# EAGLE board R2Quad Power Distribution Board (EAGLE 7.3.0)
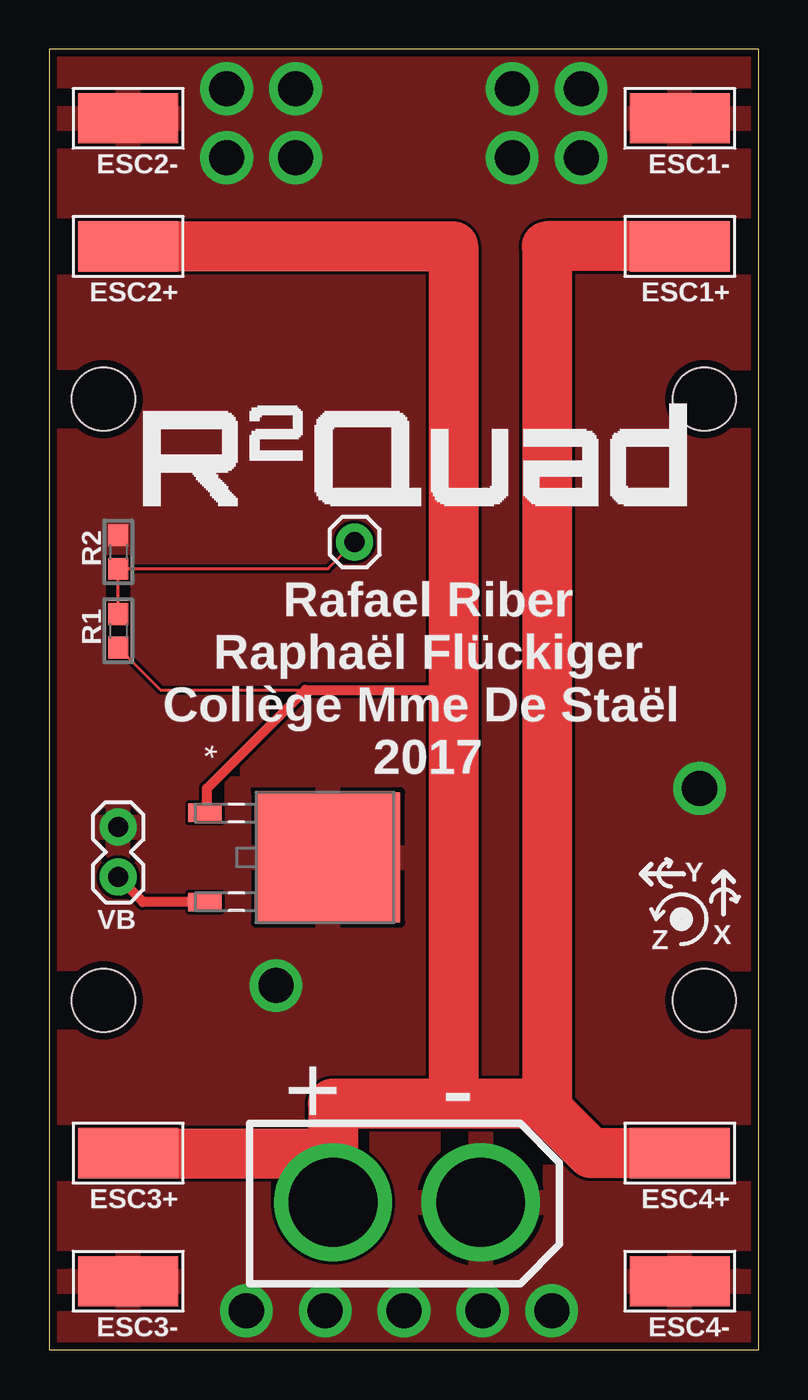
[diagram p0: board, top side]
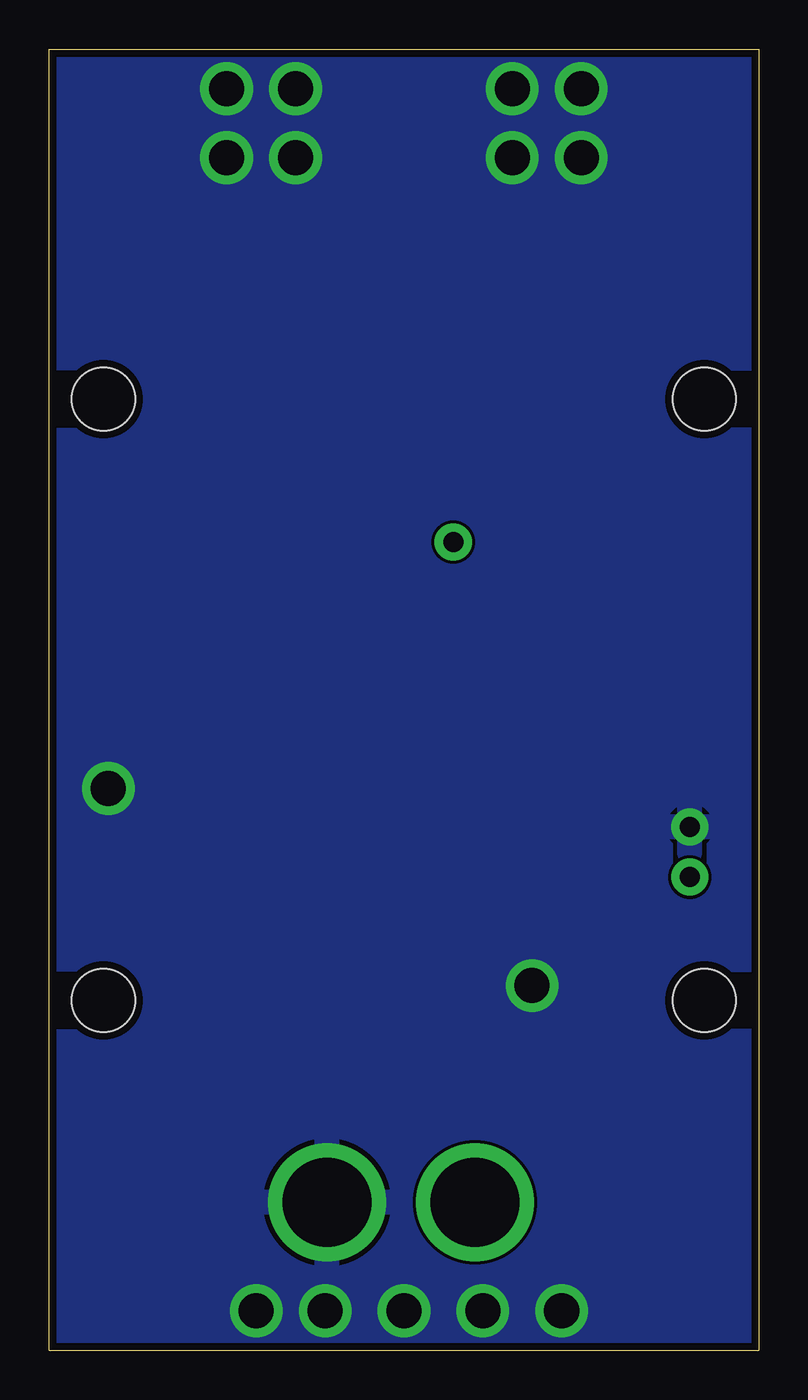
[diagram p1: board, bottom side, seen from below]

Size 36 x 66 mm. Coordinates in mm from the lower left corner, seen from the top.
Outline: 36,0 36,66 0,66 0,0 36,0
Copper layers (1*16): Top 0.0356mm / dielectric 1.5011mm / Bottom 0.0356mm
Design rules "oshpark-2layer-tented *": minimum track width 6mil, minimum drill 13mil, track to track 6mil, track to pad 6mil, pad to pad 6mil, via to via 6mil, smd to smd 6mil, copper to edge 15mil, drill to drill 6mil, minimum pad ring 7mil, minimum via ring 7mil, stop-mask expansion 2.5mil, vias tented up to drill 200mil, thermal gap 10mil
Holes 3.2 mm at 2.75,17.75 33.25,17.75 33.25,48.25 2.75,48.25

## Footprints (pad centres in the part's own frame; a part is rotated, then mirrored left to right if it is on the bottom)
5-2,5 = smd 2.54 x 5.08: 1 0,0
0603 = smd 1.1 x 1: 1 -0.85,0; 2 0.85,0
TO228P972X240-3N = smd 0.94 x 1.702: 1 -2.261,-6.096; 3 2.261,-6.096 | smd 6.604 x 7.315: 2 0,0.152
XT60 = drill 4.5 pad 6: 1 4,4; 2 11.5,4
1X02 = drill 1.016 pad 1.88: 1 0,0; 2 2.54,0
1X01 = drill 1.016 pad 1.88: 1 0,0

## Placement (x,y rotation side)
ESC1+  WIREPADSMD5-2,5  [5-2,5]  32,56 90 top
ESC1-  WIREPADSMD5-2,5  [5-2,5]  32,62.5 90 top
ESC2+  WIREPADSMD5-2,5  [5-2,5]  4,56 90 top
ESC2-  WIREPADSMD5-2,5  [5-2,5]  4,62.5 90 top
ESC3+  WIREPADSMD5-2,5  [5-2,5]  4,10 90 top
ESC3-  WIREPADSMD5-2,5  [5-2,5]  4,3.5 90 top
ESC4+  WIREPADSMD5-2,5  [5-2,5]  32,10 90 top
ESC4-  WIREPADSMD5-2,5  [5-2,5]  32,3.5 90 top
R1  4.12K  [0603]  3.5,36.5 270 top
R2  1K  [0603]  3.5,40.5 270 top
U1  LF33ABDT-TR  [TO228P972X240-3N]  14,25 270 top
U$1  XT60  [XT60]  25.9,11.5 180 top
U$2  [R2QUAD_LOGO]  16,45.5 0 top
U$3  [SENSOR_AXIS]  32.5,22.5 0 top
VB  [1X02]  3.5,24 90 top
VSENSE  [1X01]  15.5,41 0 top

## Library data of the parts
ESC1+ ESC1- ESC2+ ESC2- ESC3+ ESC3- ESC4+ ESC4- = wirepad
R1 R2 = microbuilder
U1 = LF33ABDT-TR; AVAILABILITY: Good; DESCRIPTION: LF33 Series 3.3 V 500 mA Very Low Drop Voltage Regulator with Inhibit - TO-252; MF: STMicroelectronics; MP: LF33ABDT-TR; PACKAGE: None; PRICE: 0.43 USD
U$1-U$3 = Rafael's Library
VB VSENSE = SparkFun-Connectors

## Nets
+3V3: U1.3 VB.1
GND: ESC1-.1 ESC2-.1 ESC3-.1 ESC4-.1 R2.1 U1.2 U$1.1 VB.2
N$1: R1.1 R2.2 VSENSE.1
VCC: ESC1+.1 ESC2+.1 ESC3+.1 ESC4+.1 R1.2 U1.1 U$1.2

## Tracks (layer width: path | path; a pad name or v marks a point on that pad's centre or on a via)
+3V3
  Top 0.508: U1.3 4.76,22.74 VB.1
GND  (via drill 1.78)
  other vias: 14,2 22,2 18,2 10,2 25.5,2 33,28.5 11.5,18.5 27,64 27,60.5 23.5,64 23.5,60.5 12.5,64 12.5,60.5 9,64 9,60.5
  pour Bottom: 0,66 36,66 36,0 0,0
  pour Top: 0,66 36,66 36,0 0,0
N$1
  Top 0.152: R1.1 R2.2 14.15,39.65 VSENSE.1
VCC
  Top 0.152: R1.2 5.65,33.5 13,33.5
  Top 0.508: U1.1 8,27.36 8,28.5 13,33.5 20.5,33.5
  Top 2.54: ESC3+.1 14.4,10 | 14.4,10 U$1.2 | ESC4+.1 27.5,10 25.25,12.25 | 25.25,12.25 25,12.5 20.5,12.5 | 20.5,12.5 14.4,12.5 14.4,10 | ESC1+.1 25.25,56 25.25,12.25 | ESC2+.1 20.5,56 20.5,33.5 20.5,12.5

## Text on the board
tNames: Rafael Riber / Raphaël Flückiger / Collège Mme De Staël / 2017